# Altium PCB 涂鸦幻彩灯带（立创）.PcbDoc
Units mil, origin at the board's own origin, x right, y up, seen from the top; angles counter-clockwise.
Board outline 2677.17 x 2086.61 mil, 2 copper layers (Top Layer, Bottom Layer); 35 components, 34 nets, 135 pads, 61 vias.
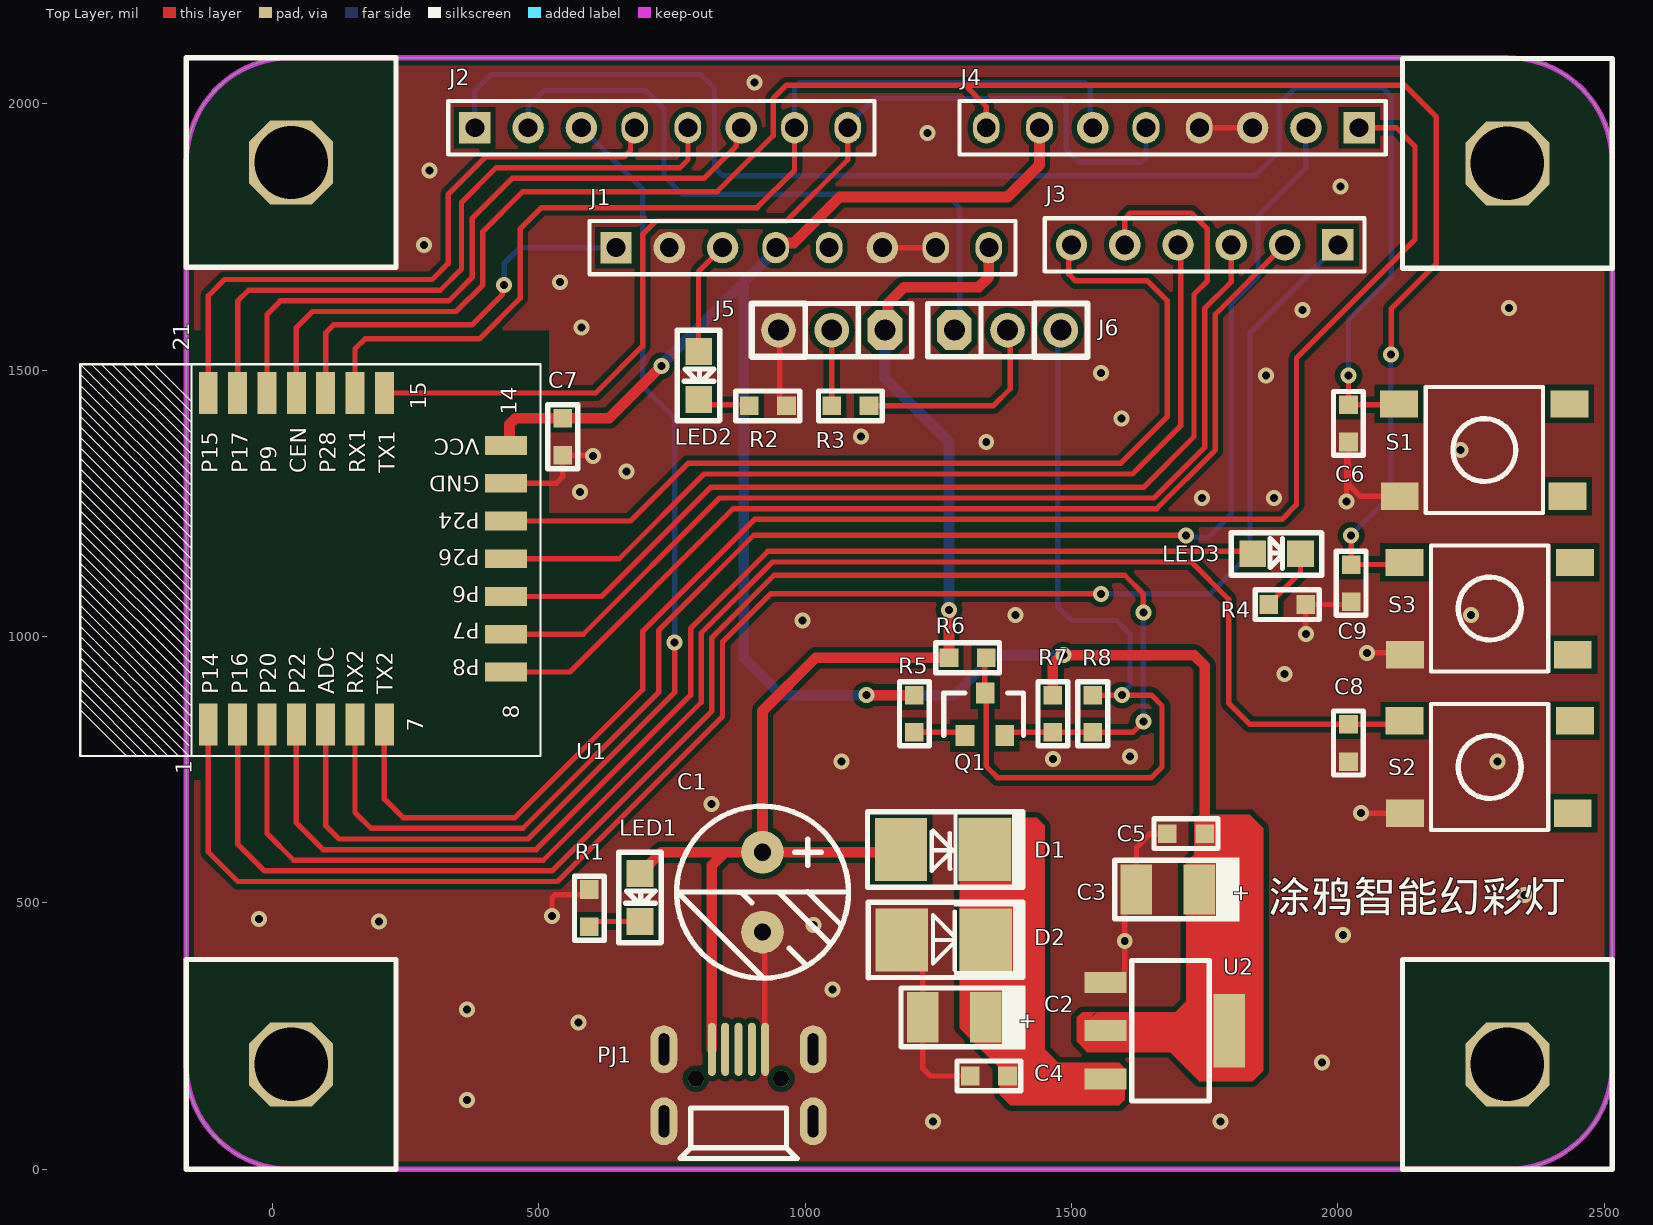
[diagram p0: Top Layer view]
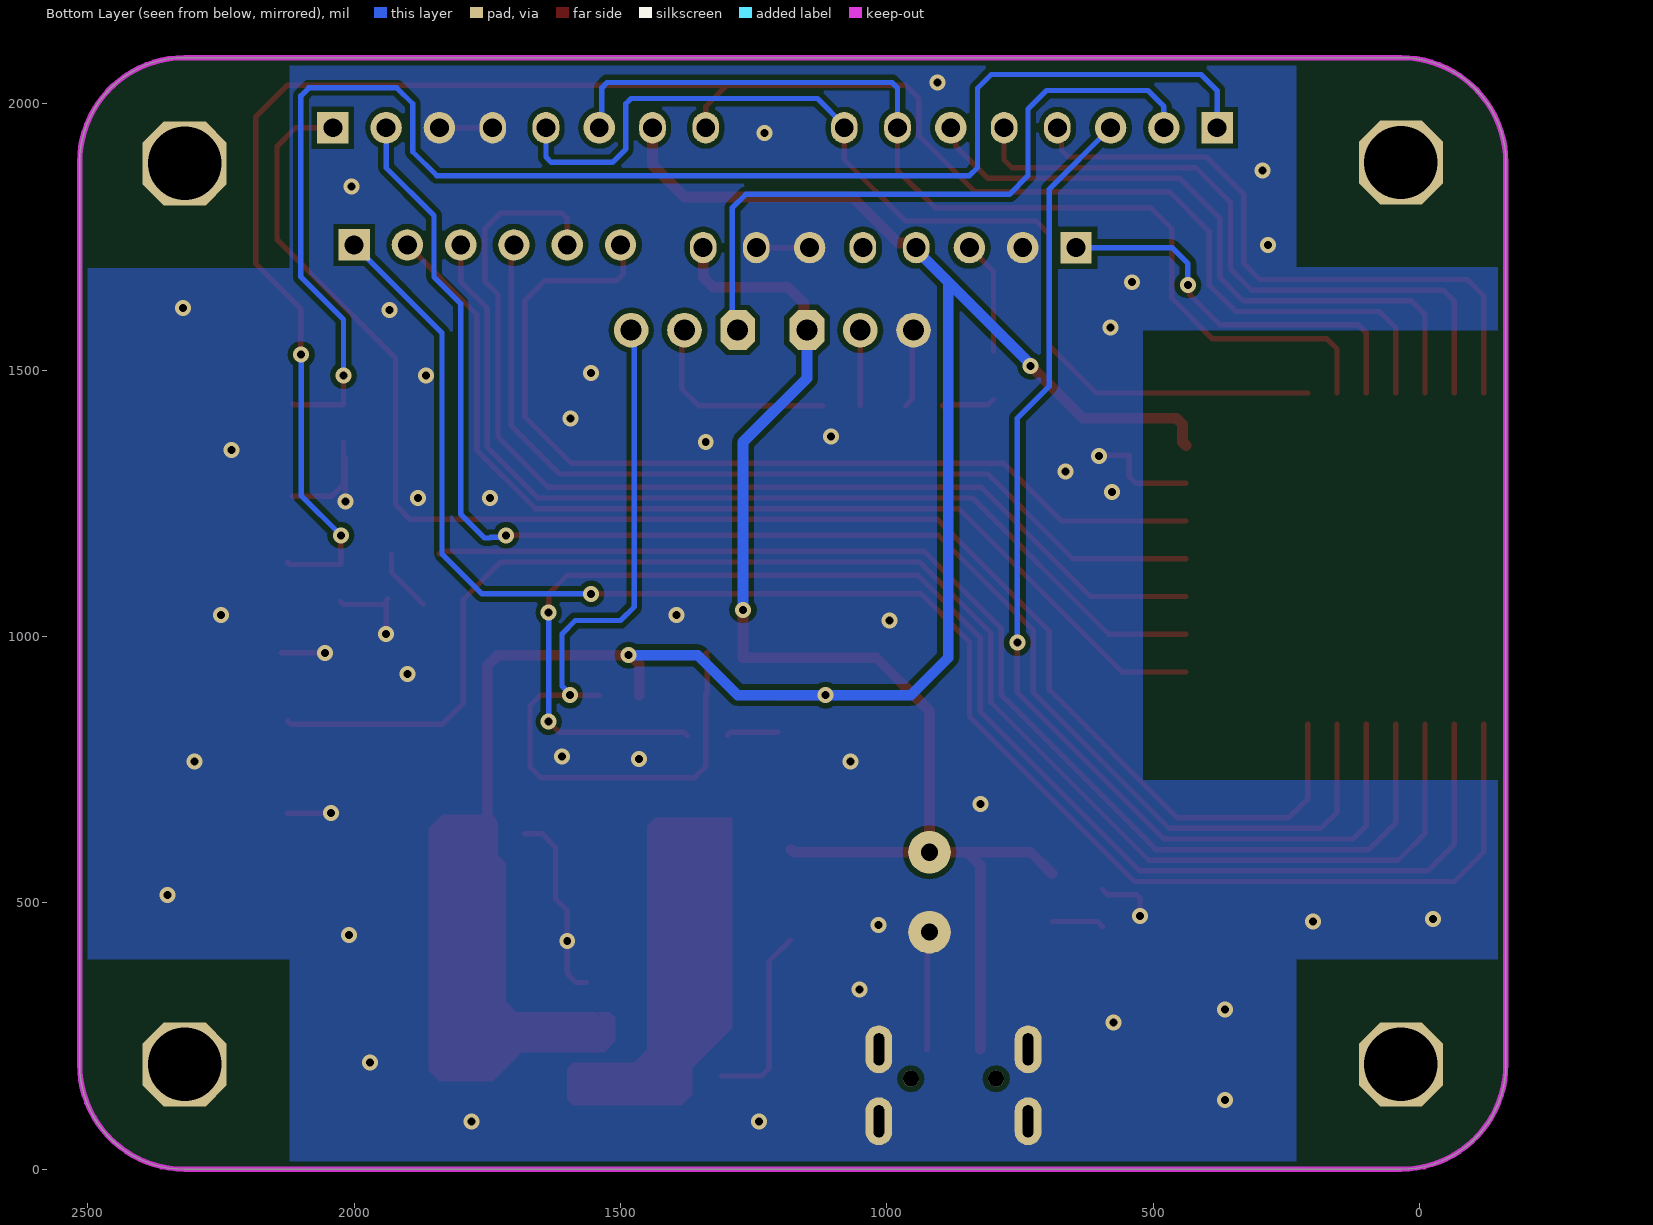
[diagram p1: Bottom Layer view, seen from below]

## Layer stack, top to bottom
Top Solder: solder mask 0.4, Solder Resist, Dk 3.5
Top Layer: signal copper 1.4
Dielectric 1: dielectric 12.6, FR-4, Dk 4.8
Bottom Layer: signal copper 1.4
Bottom Solder: solder mask 0.4, Solder Resist, Dk 3.5

## Board outline
-161.85,196.85 -161.85,1889.76 cw(c35,1889.76) 35,2086.61 2318.47,2086.61 cw(c2318.47,1889.76) 2515.31,1889.76 2515.31,196.85 cw(c2318.47,196.85) 2318.47,0 35,0 cw(c35,196.85)
cut-out: -4370,-1220 -4360,-1220 -4360,-1210 -4370,-1210

## Design rules (kind name [scope] priority, off if disabled: settings)
Clearance [All] p1: gap=10 ignorepadtopadclearanceinfootprint=FALSE except(0: Arc-Hole Track-Hole SMDPad-Hole THPad-Hole Via-Hole Fill-Hole Poly-Hole Region-Hole Text-Hole; 6: Arc-Arc Arc-Track Arc-SMDPad Track-Track Track-SMDPad SMDPad-SMDPad)
HoleSize [All] p1: absolutevalues=TRUE maxlimit=300 minlimit=1 maxpercent=80.000 minpercent=20.000
HoleToHoleClearance [All] p1: gap=2 allowstackedmicrovias=TRUE
MinimumSolderMaskSliver [All] p1: minsoldermaskwidth=2
PolygonConnect [All] p1: connectstyle=Direct reliefconductorwidth=10 reliefentries=4 polygonreliefangle="90 Angle" airgapwidth=10
RoutingVias [All] p1: holewidth=15 width=30 viastyle="Through Hole" minholewidth=300 minwidth=30 maxholewidth=600 maxwidth=300
SilkToSilkClearance [All] p1: silktosilkclearance=2
SilkToSolderMaskClearance [IsPad] p1: minsilkscreentomaskgap=2 clearancetoexposedcopper=TRUE
SolderMaskExpansion [All] p1: expansion=4
Width Width_1 [InNetClass('POWER')] p1: maxlimit=20 minlimit=20 preferedwidth=20
Width [All] p2: maxlimit=10 minlimit=10 preferedwidth=10
25 further rules are at their usual default settings.

## Classes and differential pairs
net class POWER: +3.3V +5V

## Components (designator, comment, footprint, x,y, rotation, side; value= is the part's Value field where it differs from the comment)
C1 "220uF±20%/16V" CD0.15 920,520 r270 top
C2 "22uF±20%/16V" 钽电容B3528 1280,285 r180 top
C3 "22uF±20%/16V" 钽电容B3528 1680.94,525 r180 top
C4 "0.1uF±20%/50V" C0603 1380,175 r180 top
C5 "0.1uF±20%/50V" C0603 1750,630 r180 top
C6 "0.1uF±20%/16V" C0603 2020,1365 r90 top
C7 "0.1uF±20%/16V" C0603 545,1340 r90 top
C8 "0.1uF±20%/16V" C0603 2020,765 r90 top
C9 "0.1uF±20%/16V" C0603 2025,1135 r270 top
D1 "SS210" SMA(DO-214AC) 1258.74,600 r0 top
D2 "SMBJ05CA" SMB(DO-214AA) 1260,430 r0 top
J1 "CON8" HDR1X8Z 645,1730 r0 top
J2 "CON8" HDR1X8Z 380,1955 r0 top
J3 "CON6" HDR1X6Z 2000,1735 r180 top
J4 "CON8" HDR1X8Z 2040,1955 r180 top
J5 "KF301-3P" "SIP3 - 2.54" 1150,1575 r180 top
J6 "KF301-3P" "SIP3 - 2.54" 1280,1575 r0 top
LED1 "LED" LED0805_1 690,555 r270 top
LED2 "LED" LED0805_1 800,1535 r270 top
LED3 "LED" LED0805_1 1840,1155 r0 top
PJ1 "MCR_USB" MICRO_USB-NEW-16.12.12 875,157.5 r180 top
Q1 "S8050" SOT-23-NPN 1300,814 r0 top
R1 "1R±5%" R0603 595,455 r90 top
R2 "1K±5%" R0603 965,1433 r180 top
R3 "1R±5%" R0603 1120,1433 r180 top
R4 "1K±5%" R0603 1870,1060 r0 top
R5 "2K±5%" R0603 1205,890 r270 top
R6 "2K±5%" R0603 1270,960 r0 top
R7 "2K±5%" R0603 1465,890 r270 top
R8 "NC/0R" R0603 1540,820 r90 top
S1 "KEY_SW2" KEY4-SMD 2275,1350 r0 top
S2 "KEY_SW2" KEY4-SMD 2285,755 r0 top
S3 "KEY_SW2" KEY4-SMD 2285,1052.5 r0 top
U1 "WIFI_BLE_CBU" WIFI_BLE_CBU 438.58,1146.02 r90 top
U2 "GM1117-3.3ST3T" SOT-223 1680,260 r270 top

## Footprints (in the part's own frame and the unit in brackets; to place one, negate y for a bottom-side part, rotate by r counter-clockwise, add the part's x,y. Pads: shape width x height; smd on the part's side, far side on the other; paste and mask are expansions set on the pad)
C0603 [mil]
  rect 35x35 smd: 1(0,0) 2(70,0)
  silkscreen extent -25,-28 95,28, body extent 4,-16 66,15, height 12
CD0.15 [mil]
  round 80 hole 32: 1(-75,0) 2(75,0)
  silkscreen extent -161,-161 161,161, body extent -156,-150 158,165, height 630
HDR1X6Z [mm] "Connector; Header; 5 Position"
  rect 1.5x1.5 hole 0.9: 1(0,0)
  round 1.5 hole 0.9: 2(2.54,0) 3(5.08,0) 4(7.62,0) 5(10.16,0) 6(12.7,0)
  silkscreen extent -1.27,-1.27 13.97,1.27, body extent -1.27,-1.25 13.97,1.25, height 8.65
HDR1X8Z [mm] "Connector; Header; 8 Position"
  rect 1.5x1.5 hole 0.9: 1(0,0)
  round 1.5 hole 0.9: 2(2.54,0) 3(5.08,0) 6(12.7,0)
  oval 1.27x1.5 hole 0.9: 4(7.62,0) 5(10.16,0) 7(15.24,0) 8(17.78,0)
  silkscreen extent -1.27,-1.27 19.05,1.27, body extent -1.27,-1.25 19.05,1.25, height 8.65
KEY4-SMD [mm]
  rect 1.8x1.3 smd: 1(-4.035,-2.2) 2(-4.065,2.2) 3(4.065,2.2) 4(3.965,-2.2)
  silkscreen extent -2.79,-3 2.79,3
LED0805_1 [mil]
  rect 50x50 smd: 1(0,0) 2(90,0)
  silkscreen extent -40,-40 130,40, body extent 6,-25 84,24, height 30
MICRO_USB-NEW-16.12.12 [mil]
  oval 15x100 smd: 1(-50,-67.5) 2(-25,-67.5) 3(0,-67.5) 4(25,-67.5) 5(50,-67.5)
  oval 50x90 hole 20 slot 60 at 90 deg: 6(-140,-67.5) 7(-140,67.5) 8(140,67.5) 9(140,-67.5)
  round 30 hole 30 unplated: ""(-80,-12.5) ""(80,-12.5)
  silkscreen extent -110,42 110,138, body extent -145,-79 146,158, height 93
R0603 [mil]
  rect 35x35 smd: 1(0,0) 2(70,0)
  silkscreen extent -25,-28 95,28, body extent 2,-16 65,16, height 18
"SIP3 - 2.54" [mil]
  oct 65x75 hole 39.37: 1(0,0)
  round 65 hole 39.37: 2(100,0) 3(200,0)
  silkscreen extent -50,-50 250,50
SMA(DO-214AC) [mm]
  rect 2.5x3 smd: 1(-2,0) 2(2,0)
  silkscreen extent -3.6,-1.84 3.94,1.83, body extent -2.21,-1.38 2.46,1.27, height 2.35
SMB(DO-214AA) [mm]
  rect 2.5x3 smd: 1(-2,0) 2(2,0)
  silkscreen extent -3.6,-1.8 3.91,1.82, body extent -2.28,-1.33 2.39,1.32, height 2.35
SOT-23-NPN [mil]
  rect 35x40 smd: 1(75,0) 2(0,0) 3(38,80)
  silkscreen extent -40,0 110,80, body extent -17,-17 97,80, height 39
SOT-223 [mm]
  rect 1x2 smd: 1(-2.3,-2.95) 2(0,-2.95) 3(2.3,-2.95)
  rect 3.5x1.5 smd: 2(0,2.95)
  silkscreen extent -3.35,-1.71 3.35,1.99, body extent -3.29,-3.55 3.21,3.41, height 1.65
WIFI_BLE_CBU [mm]
  rect 2x0.9 smd: 1(-7.9,14.2) 2(-7.9,12.8) 3(-7.9,11.4) 4(-7.9,10) 5(-7.9,8.6) 6(-7.9,7.2) 7(-7.9,5.8) 15(7.9,5.8) 16(7.9,7.2) 17(7.9,8.6) 18(7.9,10) 19(7.9,11.4) 20(7.9,12.8) 21(7.9,14.2)
  rect 0.9x2 smd: 8(-5.4,0) 9(-3.6,0) 10(-1.8,0) 11(0,0) 12(1.8,0) 13(3.6,0) 14(5.4,0)
  silkscreen extent -9.4,-1.65 9.28,20.33
钽电容B3528 [mm]
  rect 1.5x2.4 smd: 1(-1.5,0) 2(1.5,0)
  silkscreen extent -3.4,-1.52 2.54,1.52

## Part data
C1 C2 C3: library part "CAPACITOR POL", "Capacitor"
C4 C5 C6 C7 C8 C9: library part CAP, "Capacitor"
D1: library part Diode1, "Diode"
D2: library part "D Schottky", "Schottky Diode"
J1 J2 J3 J4: "Connector"
J5 J6: library part CON3, "Connector"
Q1: library part NPN, "NPN Transistor"
R1 R2 R3 R4 R5 R6 R7 R8: library part RES5
U1: "Module"
U2: library part GM1117

## Free pads (board coordinates)
  oct 157.48x157.48 hole 137.8: 1(35,196.85) 1(35,1889.76) 1(2318.15,196.85) 1(2318.15,1888.15)

## Via types
v1: diameter 30, hole 15, Top Layer to Bottom Layer, tented both sides, 61 vias

## Nets (pads, with @x,y where several pads share a name; then routed paths per layer and width w, separated by ;. In a path a pad name is that pad's centre, name@x,y a point inside that pad or via, vN(x,y) a via of type N, cw(c..) or ccw(c..) an arc to the next point about the centre after c; other vN are vias at no path point)
+3.3V: C3.1 C5.1 C7.2 J1.4 J4.7 R5.1 R7.1 U1.14 U2.2 | length 3442.2
  Top Layer w20: U1.14 445,1365.04 445,1398.28 456.72,1410 C7.2 632.26,1410 v1(730,1507.74) ; J1.4 953.65,1738.65 978.65,1738.65 1065,1825 1380,1825 1440,1885 J4.7 ; v1(1115,890) R5.1 ; R7.1 1465,948.28 1481.72,965 v1(1485,965) 1730,965 1750,945 C5.1
  Bottom Layer w20: v1(730,1507.74) 730,1510.47 885,1665.47 ; J1.4 945,1725.47 885,1665.47 ; v1(1485,965) 1355,965 1280,890 v1(1115,890) 955,890 885,960 885,1665.47
+5V: C1.1 D1.1 J1.8 J5.1 LED1.1 PJ1.5 R6.1 | length 2527.9
  Top Layer w20: LED1.1 730,595 850,595 ; PJ1.5 825,570 850,595 ; J5.1 1155.59,1580.59 1155.59,1625.59 1185.92,1655.92 1325.92,1655.92 1345,1675 J1.8 ; D1.1 1175,595 C1.1 ; v1(1270,1050) R6.1 1020,960 920,860 C1.1 ; 850,595 C1.1
  Bottom Layer w20: J5.1 1150,1559.61 1150,1485 1270,1365 v1(1270,1050)
+5VF: J1.5
ADC: J2.3 U1.5 | length 2101.8
  Top Layer w10: U1.5 100,645 125,620 480,620 755,895 v1(755,988.36)
  Bottom Layer w10: J2.3 695,1840 695,1470 755,1410 v1(755,988.36)
GND: C1.2 C2.2 C3.2 C4.2 C5.2 C6.1 C7.1 C8.1 C9.2 D2.1 J1.2 J1.6 J1.7 J4.3 J4.4 J5.3 PJ1.1 PJ1.6 PJ1.7 PJ1.8 PJ1.9 R1.2 R2.1 R4.2 S1.1 S2.1 S3.1 U1.13 U2.1 | length 2185.7
  Top Layer w10: U1.13 532.76,1287.76 545,1300 C7.1 v1@600,1340 ; v1(525,475) 525,509.14 530.86,515 585,515 R1.2 ; C1.2 924.04,440.96 924.04,225.96 PJ1.1 ; J5.3 952.5,1572.5 952.5,1445.5 R2.1 ; J1.6 J1.7 ; D2.1 1220.94,390.32 C2.2 1220.94,189.06 1235,175 C4.2 ; U2.1 1583.54,350.55 1598.23,365.24 1598.23,369.32 1600,371.1 v1(1600,428.24) 1600,485.39 1621.89,507.28 C3.2 1621.89,604.21 1647.68,630 C5.2 ; J4.4 J4.3 ; R4.2@1936.61,1071.14 1940,1067.76 R4.2 ; v1(1940,1005) R4.2 ; v1(2016.61,1253.39) 2016.61,1336.14 ; C6.1 2020,1285 2041.61,1263.39 S1.1 ; C9.2 2020,1060 R4.2 ; v1(2043.39,668.39) S2.1 ; v1(2054.53,969.27) S3.1@2137.28,969.27
  other v1: 1240,90 1780,90 365,130 1970,200 575,275 365,300 1051.41,337.41 2010,440 1015.8,458.8 200,465 -25,470 2350,515 824.43,685.93 1068.27,765.3 2300,765 1465,770 1610,775 1900,930 995,1030 1395,1040 2250,1040 1745,1260 1880,1260 577.2,1271.01 665,1310 602.23,1338.93 2230,1350 1340,1365 1105,1375 1594.11,1408.78 1865,1490 1555,1495 580,1580 1933.25,1613 2321.4,1616.61 540,1665 285,1735 2005,1845 295,1875 1230,1945 905,2040
NetC2_1: C2.1 C4.1 D1.2 D2.2 U2.3 | length 628.8
  Top Layer w10: D1.2 1337.48,431.26 D2.2 1339.06,429.68 C2.1 1356.39,267.67 1356.39,228.61 1380,205 C4.1 1385.55,169.45 U2.3
NetC6_2: C6.2 J2.1 S1.2 | length 2804.5
  Top Layer w10: v1(2020,1490) C6.2 2113.35,1435 S1.2
  Bottom Layer w10: J2.1 380,2025 410,2055 804.14,2055 830,2029.14 830,1880 845,1865 1845,1865 1890,1910 1890,2000 1920,2030 2085,2030 2100,2015 2100,1675 2020,1595 v1(2020,1490)
NetJ1_3: J1.3 LED2.1 | length 213.6
  Top Layer w10: LED2.1 800,1685 J1.3
NetJ5_2: J5.2 R3.2 | length 142
  Top Layer w10: R3.2 J5.2
NetLED1_2: LED1.2 R1.1 | length 99.1
  Top Layer w10: R1.1 605,465 LED1.2
NetLED2_2: LED2.2 R2.2 | length 100
  Top Layer w10: LED2.2 810,1435 893,1435 R2.2
NetLED3_2: LED3.2 R4.1 | length 119.9
  Top Layer w10: R4.1 1930,1120 LED3.2
NetQ1_2: Q1.2 R5.2 | length 97.5
  Top Layer w10: R5.2 1294,820 Q1.2
OUT_DATA: Q1.1 R7.2 R8.1 U1.2 | length 2782
  Top Layer w10: U1.2 -65.35,610.35 -15,560 525,560 825,860 825,998.28 941.72,1115 1600,1115 1635,1080 v1(1635,1045) ; Q1.1 1381,820 R7.2 R8.1 1615,820 v1(1635,840)
  Bottom Layer w10: v1(1635,840) v1(1635,1045)
OUT_RGB: J6.2 R3.1 | length 390.3
  Top Layer w10: R3.1 1353,1433 1385,1465 1385,1570 J6.2
OUT_RGB_ARD: J2.2 J6.1 | length 1260.9
  Bottom Layer w10: J2.2 480,1995 510,2025 700,2025 735,1990 735,1865 770,1830 1265,1830 1290,1805 1290,1585 J6.1
OUT_RGB_CBU: J6.3 Q1.3 R6.2 R8.2 | length 1608.7
  Top Layer w10: R6.2@1337.46,960 1337.46,894.54 1340,892 1340,755.86 1360.86,735 1650,735 1670,755 1670,870 1650,890 v1(1595,890) R8.2 ; R6.2@1337.46,970.09 R6.2@1340,967.54
  Bottom Layer w10: J6.3 1474.14,1569.14 1474.14,1055.86 1500,1030 1585,1030 1610,1005 1610,907.43 1595,892.43 v1(1595,890)
P6: J3.5 U1.10 | length 2037.5
  Top Layer w10: U1.10 617.78,1075.16 822.63,1280 1635,1280 1730,1375 1730,1642.5 1755,1667.5 1755,1765 1725,1795 1610,1795 1600,1785 J3.5
P6_KEY1: C8.2 S2.2 U1.3 | length 2912.2
  Top Layer w10: U1.3 -10.24,630.24 40,580 508.43,580 805,876.57 805,1006.57 938.43,1140 1725,1140 1795,1070 1795,875 1835,835 C8.2 2118.35,835 S2.2
P7: J3.3 U1.9 | length 1857.4
  Top Layer w10: U1.9 583.43,1004.29 839.13,1260 1655,1260 1750,1355 1750,1615.86 1800,1665.86 J3.3
P8: J3.2 U1.8 | length 1942.8
  Top Layer w10: U1.8 558.43,933.43 865,1240 1660,1240 1770,1350 1770,1605 J3.2
P9: J2.6 U1.19 | length 1262.7
  Top Layer w10: U1.19 -10.24,1604.76 15,1630 331,1630 375,1674 375,1785 450,1860 810,1860 871.01,1921.01 871.01,1946.01 J2.6
P14: J3.1 U1.1 | length 3203.1
  Top Layer w10: U1.1 -120.47,595.47 -65,540 535,540 845,850 845,990 935,1080 v1(1555,1080)
  Bottom Layer w10: v1(1555,1080) 1760,1080 1835,1155 1835,1570 J3.1
P15: J2.4 U1.21 | length 1210.3
  Top Layer w10: U1.21 -120.47,1639.53 -90,1670 300,1670 330,1700 330,1830 400,1900 660,1900 672.35,1912.35 672.35,1947.35 J2.4
P17: J2.5 U1.20 | length 1261.1
  Top Layer w10: U1.20 -65.35,1629.65 -45,1650 315,1650 355,1690 355,1815 420,1880 765,1880 780,1895 J2.5
P22: LED3.1 U1.4 | length 2307.9
  Top Layer w10: U1.4 44.88,650.12 95,600 495,600 785,890 785,1014.85 930.15,1160 1835,1160 LED3.1
P24: J3.6 U1.12 | length 1802.6
  Top Layer w10: U1.12 671.89,1216.89 780,1325 1592.22,1325 1680,1412.78 1680,1630 1642.5,1667.5 1507.5,1667.5 1495,1680 1495,1730 J3.6
P26: J3.4 U1.11 | length 1711.4
  Top Layer w10: U1.11 651.02,1146.02 810,1305 1614.64,1305 1705,1395.36 1705,1730 J3.4
P28: J1.1 U1.17 | length 756.4
  Top Layer w10: U1.17 100,1570 115,1585 375,1585 431.29,1641.29 431.29,1656.29 v1(435,1660)
  Bottom Layer w10: v1(435,1660) 435,1700 465,1730 J1.1
RST: C9.1 J4.8 S3.2 U1.18 | length 3679.4
  Top Layer w10: U1.18 44.88,1579.88 75,1610 345,1610 395,1660 395,1760 470,1835 835,1835 940,1940 940,2010 965,2035 1300,2035 ; J4.8 1340,1995 1300,2035 ; v1(2025,1190) C9.1 2120.85,1135 S3.2 ; v1@2100,1530 2100,1615 2185,1700 2185,1975 2125,2035 1300,2035
  Bottom Layer w10: v1(2025,1190) 2099.5,1264.5 v1(2099.5,1529.21)
RX2: J4.2 U1.6 | length 2922.1
  Top Layer w10: U1.6 155.12,669.88 185,640 470,640 725,895 725,1011.42 903.58,1190 v1(1715,1190)
  Bottom Layer w10: v1(1715,1190) 1718.83,1186.17 1743.83,1186.17 1745,1185 1755,1185 1800,1230 1800,1625 1850,1675 1850,1790 1940,1880 J4.2
TX2: J4.1 U1.7 | length 3058.7
  Top Layer w10: U1.7 210.24,694.76 245,660 455,660 695,900 695,1009.71 905.29,1220 1895,1220 1922.5,1247.5 1922.5,1522.5 2145,1745 2145,1920 2110,1955 J4.1
WRX: J2.7 J4.6 U1.16 | length 1918.2
  Top Layer w10: U1.16 155.12,1540.12 173.81,1558.81 388.81,1558.81 465,1635 465,1765 505,1805 910,1805 980,1875 J2.7
  Bottom Layer w10: J2.7 980,2030 990,2040 1525,2040 1535,2030 1535,1960 J4.6
WTX: J2.8 J4.5 U1.15 | length 1978.3
  Top Layer w10: U1.15 607.05,1457.05 695,1545 695,1755 720,1780 965,1780 1080,1895 J2.8
  Bottom Layer w10: J2.8 1080,1959.53 1130.47,2010 1480,2010 1490,2000 1490,1915 1515,1890 1630,1890 1640,1900 J4.5
pads on no net: PJ1. PJ1.2 PJ1.3 PJ1.4 S1.3 S1.4 S2.3 S2.4 S3.3 S3.4

## Polygon pours and split planes (outlines as drawn)
GND on Top Layer "GND_L01_P000" (solid, remove dead copper, pour order 0): 231.85,0 2121.3,0 2121.3,393.7 2515,393.7 2515,1691.3 2121.3,1691.3 2121.3,2085 233.46,2085 231.85,2086.61 231.85,1692.91 -161.85,1692.91 -161.85,1581.85 -155,1575 520,1575 520,715 505,730 -165,730 -165,396.85 -161.85,393.7 231.85,393.7
GND on Bottom Layer "GND_L02_P001" (solid, remove dead copper, pour order 1): 231.85,0 2121.3,0 2121.3,393.7 2515,393.7 2515,1691.3 2121.3,1691.3 2121.3,2085 233.46,2085 231.85,2086.61 231.85,1692.91 -161.85,1692.91 -161.85,1581.85 -155,1575 520,1575 520,730 505,730 -165,730 -165,396.85 -161.85,393.7 231.85,393.7

## Keep-outs
Keep-Out Layer:
  the board outline again, w10

## Other copper
Top Layer:
  region net NetC2_1: 1290,265 1365,190 1365,140 1385,120 1590,120 1600,130 1600,190 1590,200 1475,200 1450,225 1450,645 1435,660 1290,660
  region net +3.3V: 1530,280 1545,295 1695,295 1750,350 1840,350 1860,330 1860,185 1840,165 1740,165 1685,220 1530,220 1510,240 1510,285 1520,295 1548,295
  region net +3.3V: 1730,650 1730,590 1715,575 1715,315 1705,305 1730,280 1860,280 1860,640 1835,665 1740,665 1735,660

## Silkscreen, mask and mechanical layers (free items; w line width, h text height)
Top Overlay:
  lines w10: -161.85,0 -161.85,393.7 231.85,393.7 231.85,0 -161.85,0 ; -161.85,1692.91 231.85,1692.91 231.85,2086.61 -161.85,2086.61 -161.85,1692.91 ; 2121.3,0 2121.3,393.7 2515,393.7 2515,0 2121.3,0 ; 2121.3,1691.3 2515,1691.3 2515,2085 2121.3,2085 2121.3,1691.3
  text "涂鸦智能幻彩灯" at 1870,463.69 h100
Mechanical 15:
  lines w0.1: 1095.73,1012.31 1097.73,1014.31

## Text inside footprints (layer, text, board x,y; h text height)
C2: Top Overlay "+" at 1405,295 h30 r270
C3: Top Overlay "+" at 1805.94,535 h30 r270
U1: Top Overlay "P15" at -102.42,1306.09 h30 r90; Top Overlay "P17" at -46.56,1306.09 h30 r90; Top Overlay "P9" at 8.04,1306.09 h30 r90; Top Overlay "CEN" at 63.27,1306.09 h30 r90; Top Overlay "P28" at 118.49,1306.09 h30 r90; Top Overlay "RX1" at 174.35,1306.09 h30 r90; Top Overlay "TX1" at 229.58,1306.09 h30 r90; Top Overlay "GND" at 389.58,1302.02 h30 r180; Top Overlay "VCC" at 389.53,1371.02 h30 r180; Top Overlay "TX2" at 225.58,892.02 h30 r90; Top Overlay "RX2" at 170.53,892.02 h30 r90; Top Overlay "ADC" at 116.11,892.02 h30 r90; Top Overlay "P22" at 61.69,892.02 h30 r90; Top Overlay "P20" at 7.27,892.02 h30 r90; Top Overlay "P16" at -46.52,892.02 h30 r90; Top Overlay "P14" at -101.57,892.02 h30 r90; Top Overlay "21" at -156.42,1536.02 h30 r90; Top Overlay "1" at -151.42,741.02 h30 r90; Top Overlay "P24" at 389.58,1232.39 h30 r180; Top Overlay "P26" at 389.58,1163.39 h30 r180; Top Overlay "P6" at 389.58,1094.56 h30 r180; Top Overlay "P7" at 389.58,1026.02 h30 r180; Top Overlay "P8" at 389.58,957.02 h30 r180; Top Overlay "7" at 283.58,821.02 h30 r90; Top Overlay "8" at 463.58,846.02 h30 r90; Top Overlay "14" at 458.58,1416.02 h30 r90; Top Overlay "15" at 288.58,1426.02 h30 r90